# Altium PCB Boost&Buck.PcbDoc
Units mil, origin at the board's own origin, x right, y up, seen from the top; angles counter-clockwise.
Board outline 2340 x 2735 mil, 2 copper layers (Top Layer, Bottom Layer); 31 components, 15 nets, 88 pads, 0 vias.
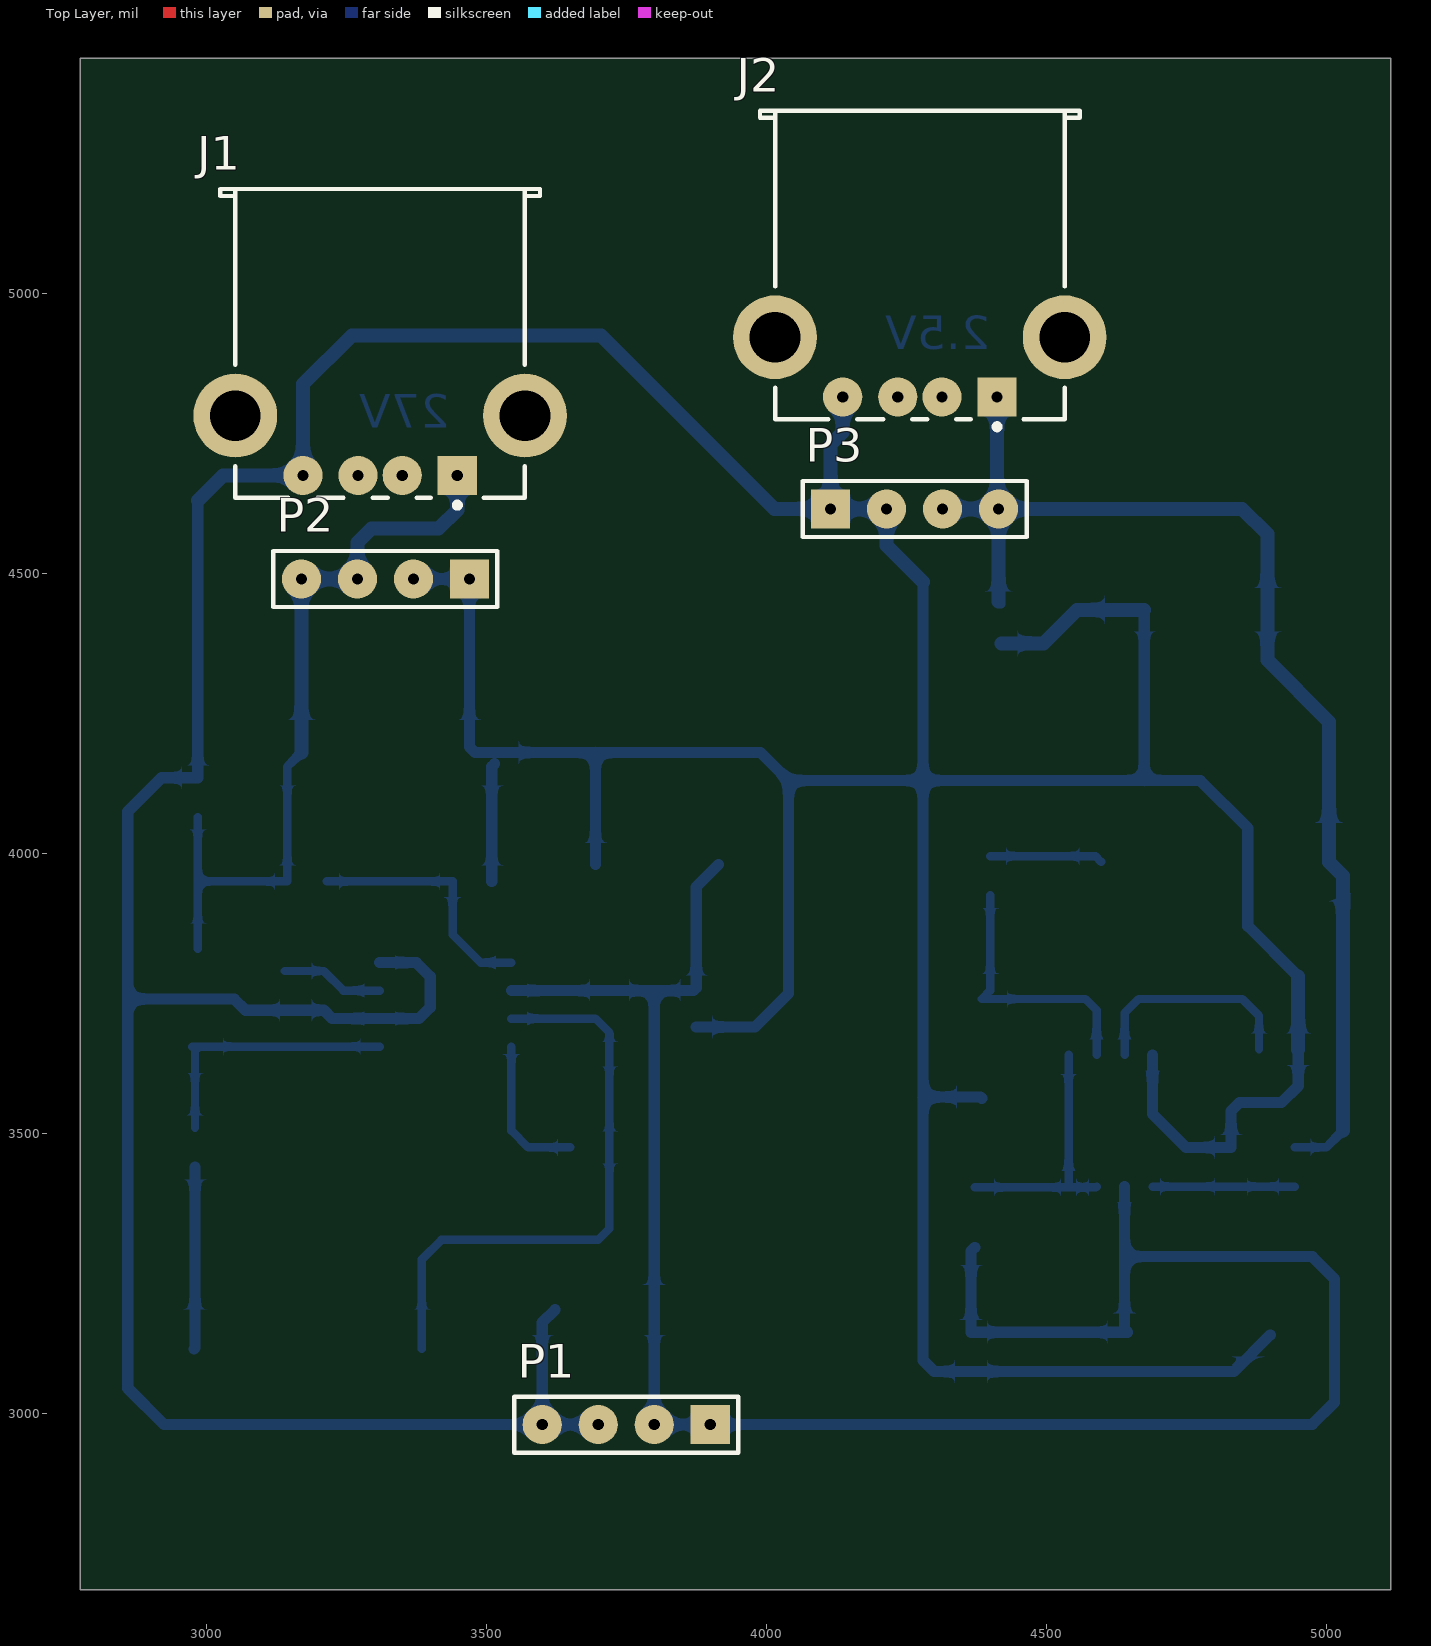
[diagram p0: Top Layer view]
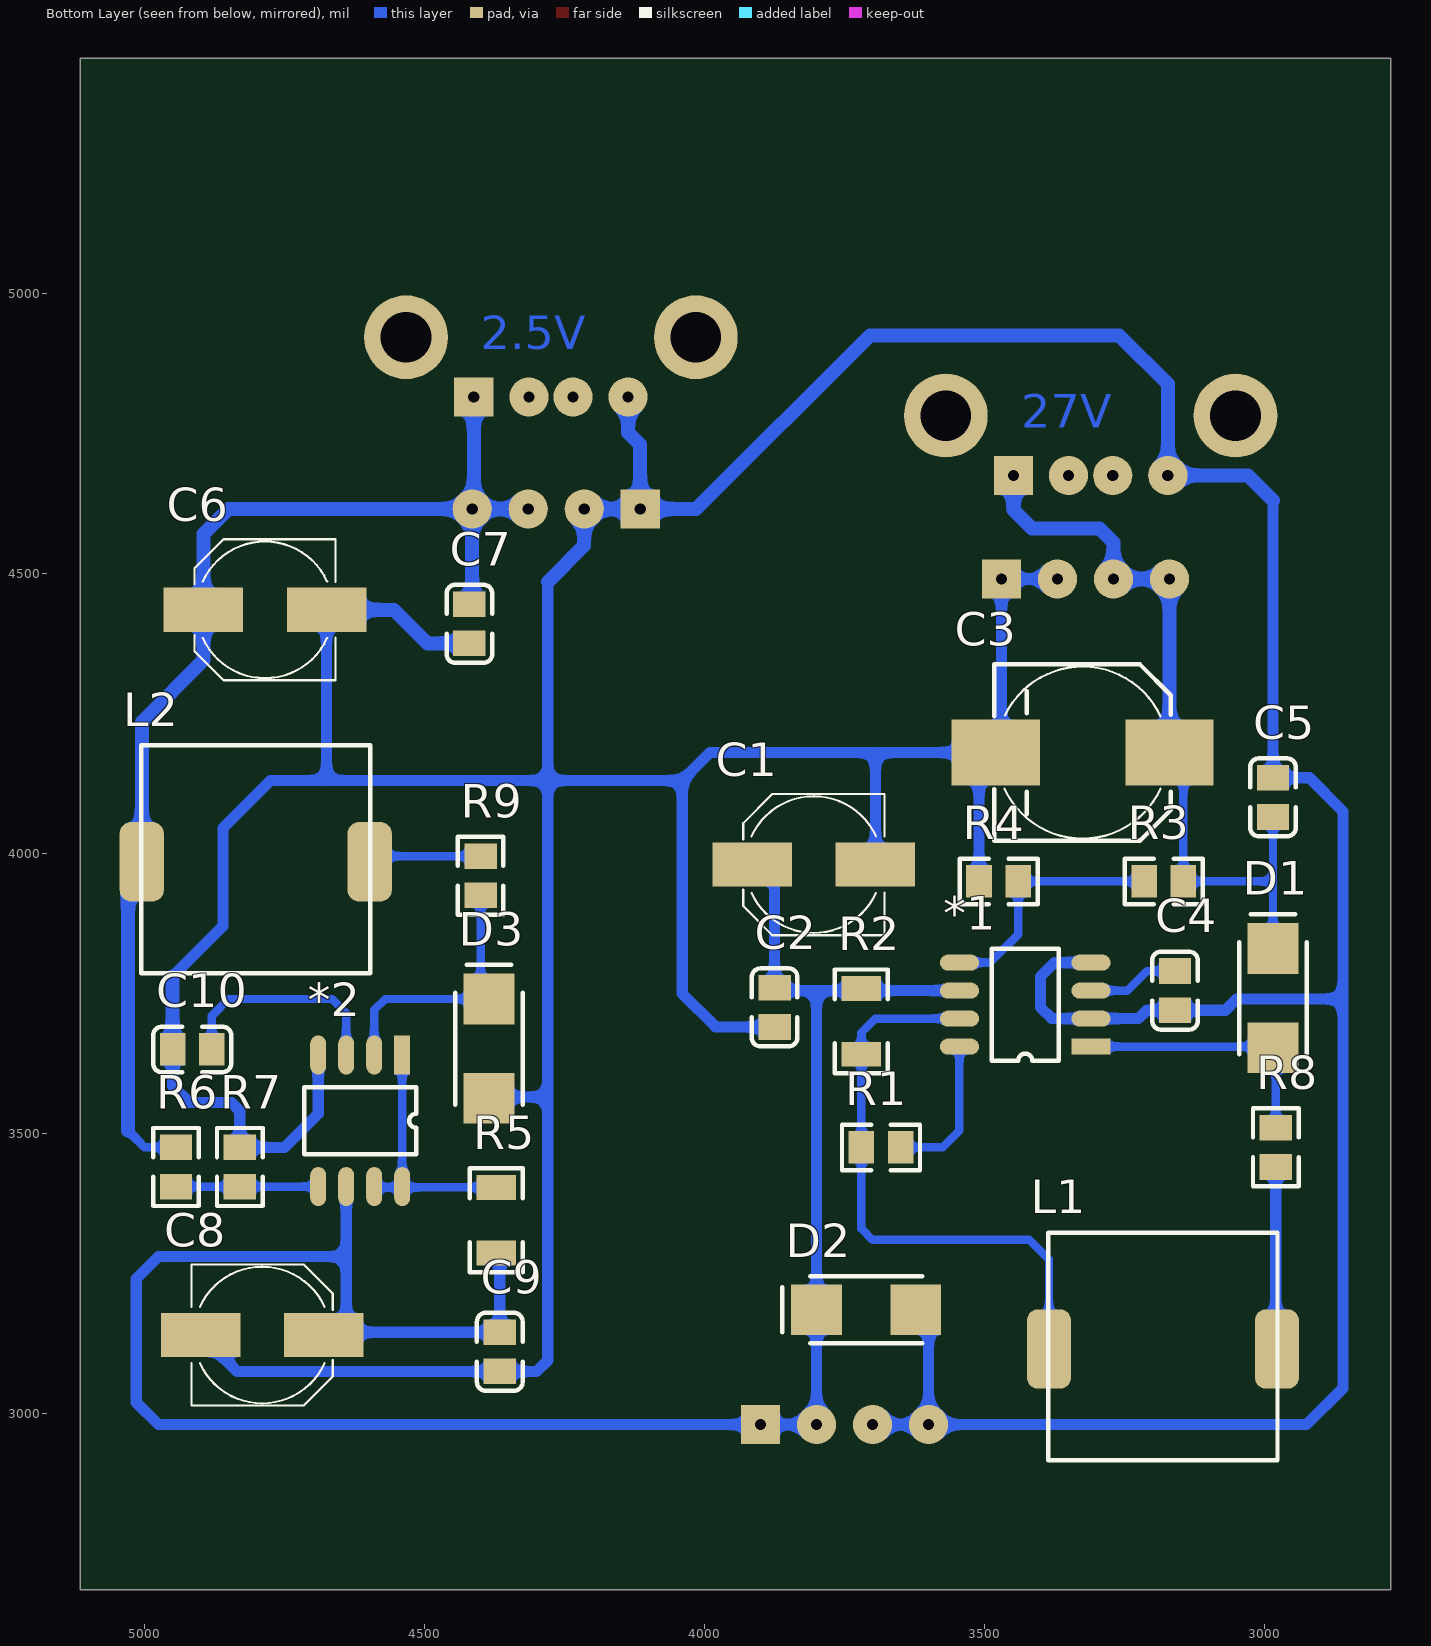
[diagram p1: Bottom Layer view, seen from below]
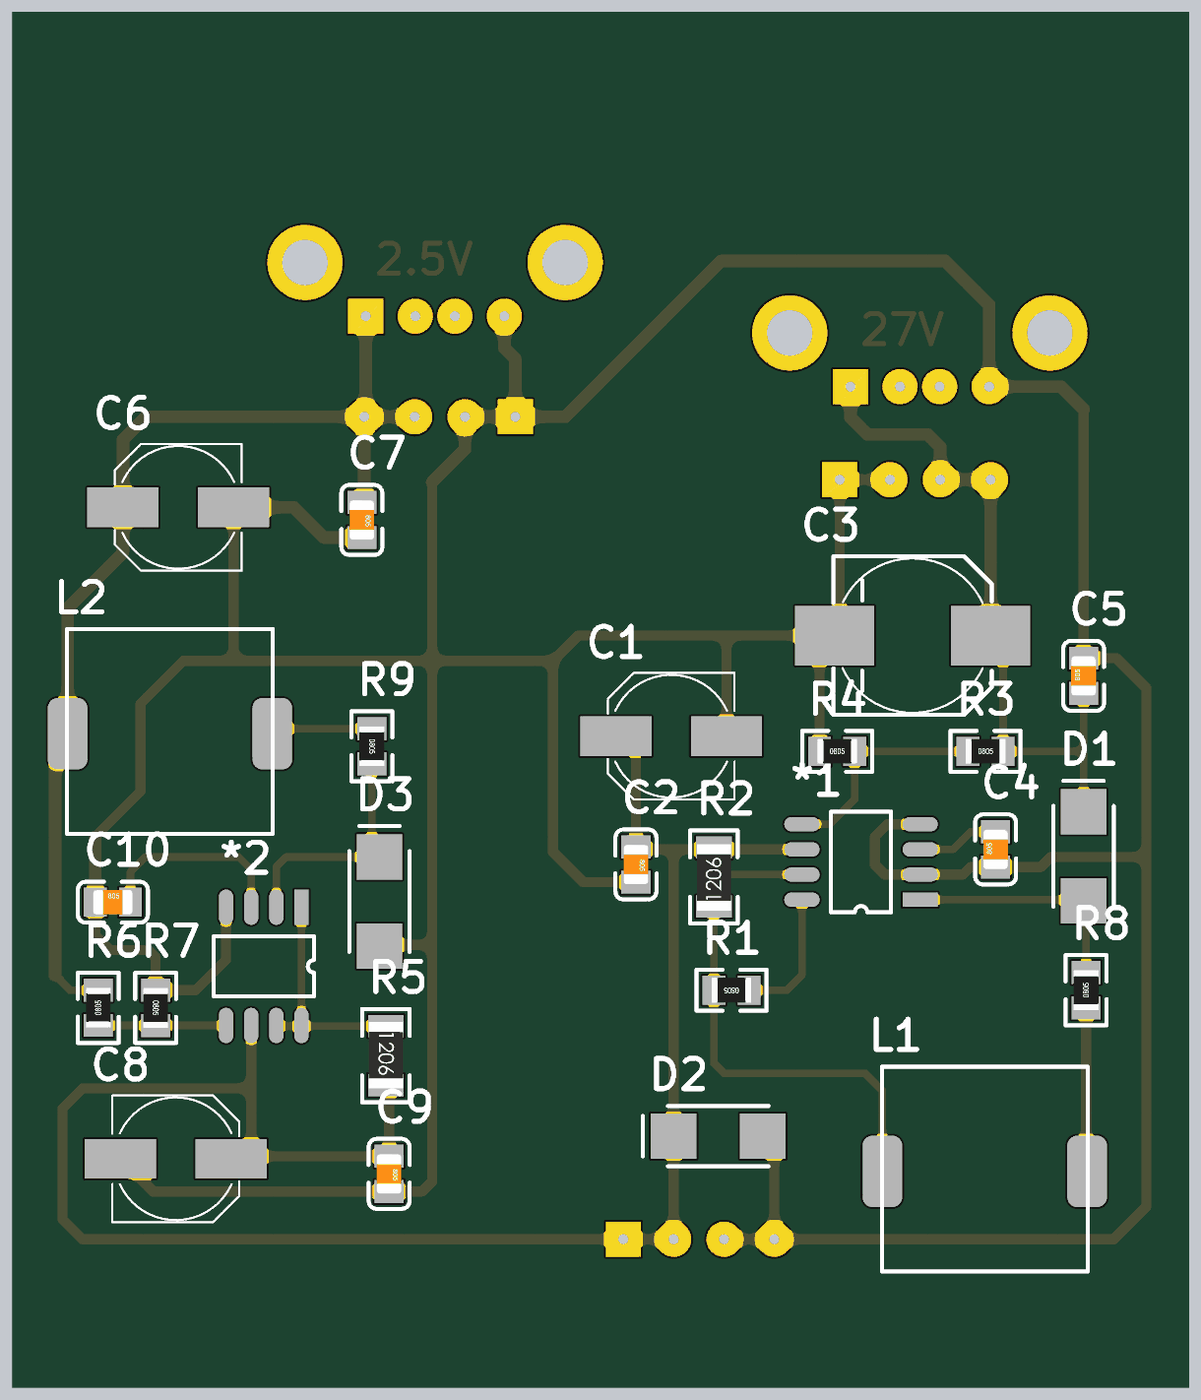
[diagram p2: 3D render of the assembled board from below, using the file's embedded part models]

## Layer stack, top to bottom
Top Solder: solder mask 0.4, Solder Resist, Dk 3.5
Top Layer: signal copper 1.4
Dielectric 1: dielectric 12.6, FR-4, Dk 4.8
Bottom Layer: signal copper 1.4
Bottom Solder: solder mask 0.4, Solder Resist, Dk 3.5

## Board outline
2775,2685 2775,5420 5115,5420 5115,2685

## Design rules (kind name [scope] priority, off if disabled: settings)
Clearance [All] p1: gap=10 ignorepadtopadclearanceinfootprint=FALSE except(0: Arc-Hole Track-Hole SMDPad-Hole THPad-Hole Via-Hole Fill-Hole Poly-Hole Region-Hole Text-Hole)
PolygonConnect [All] p1: connectstyle=Relief reliefconductorwidth=10 reliefentries=4 polygonreliefangle="90 Angle" airgapwidth=10
RoutingVias [All] p1: holewidth=28 width=50 viastyle="Through Hole" minholewidth=28 minwidth=50 maxholewidth=28 maxwidth=50
SolderMaskExpansion [All] p1: expansion=4
Width [All] p1: maxlimit=30 minlimit=7 preferedwidth=10
30 further rules are at their usual default settings.

## Components (designator, comment, footprint, x,y, rotation, side; value= is the part's Value field where it differs from the comment)
*1 "MC34063A" SOP-8 3309.88,3655 r0 bottom
*2 "MC34063A" SOP-8 4540,3640.12 r270 bottom
C1 "220uF/16V" C-RB-S6 3805,3980 r180 bottom
C2 "100nF" 0805_C 3875,3725 r270 bottom
C3 "100uF/50V" C-RB-S8 3325,4180 r0 bottom
C4 "510pF" 0805_C 3160,3755 r90 bottom
C5 "100nF" 0805_C 2985,4100 r90 bottom
C6 "220uF/16V" C-RB-S6 4785,4435 r180 bottom
C7 "100nF" 0805_C 4420,4410 r270 bottom
C8 "220uF/16V" C-RB-S6 4790,3140 r0 bottom
C9 "100nF" 0805_C 4365.75,3110 r270 bottom
C10 "510pF" 0805_C 4915,3650 r180 bottom
D1 "FR107" DIODE-SMA 2985,3652.84 r90 bottom
D2 "FR107" DIODE-SMA 3622.84,3185 r0 bottom
D3 "FR107" DIODE-SMA 4385,3562.84 r90 bottom
J1 "USB" USB_A1 3310.63,5186.42 r90 top
J2 "USB" USB_A1 4274.37,5326.42 r90 top
L1 "10uH" CDRH104R 3386,2916 r90 bottom
L2 "10uH" CDRH104R 5006,3786 r90 bottom
P1 "Header 4" HDR1X4 3900,2980 r180 top
P2 "Header 4" HDR1X4 3470,4490 r180 top
P3 "Header 4" HDR1X4 4115,4615 r0 top
R1 "100Ω" 0805_R 3685,3475 r0 bottom
R2 "330mR" 1206_R 3720,3700 r90 bottom
R3 "47kΩ" 0805_R 3180,3950 r180 bottom
R4 "2K2" 0805_R 3475,3950 r180 bottom
R5 "330mR" 1206_R 4372.24,3345 r270 bottom
R6 "3.3KΩ" 0805_R 4943.94,3440.04 r90 bottom
R7 "3.3KΩ" 0805_R 4830,3440 r270 bottom
R8 "0Ω" 0805_R 2980,3475 r90 bottom
R9 "0Ω" 0805_R 4400,3960 r270 bottom

## Footprints (in the part's own frame and the unit in brackets; to place one, negate y for a bottom-side part, rotate by r counter-clockwise, add the part's x,y. Pads: shape width x height; smd on the part's side, far side on the other; paste and mask are expansions set on the pad)
0805_C [mm]
  rect 1.16x1.47 smd: 1(-0.89,0) 2(0.89,0)
  silkscreen extent -1.77,-1.04 1.77,1.04, body extent -1,-0.63 1,0.63, height 0.77
0805_R [mm]
  rect 1.16x1.47 smd: 1(-0.89,0) 2(0.89,0)
  silkscreen extent -1.77,-1.04 1.77,1.03, body extent -1,-0.63 1,0.63, height 0.49
1206_R [mm]
  rect 1.13x1.8 smd: 1(-1.49,0) 2(1.49,0)
  silkscreen extent -2.36,-1.2 2.35,1.2, body extent -1.7,-0.86 1.65,0.87, height 0.85
C-RB-S6 [mm] "贴片电解"
  rect 3.6x2 smd: 1(-2.794,0) 2(2.794,0)
  silkscreen extent -3.2,-3.2 3.2,3.2, body extent -3.15,-3.12 3.15,3.17, height 7.7
C-RB-S8 [mm] "贴片电解"
  rect 4x3 smd: 1(-3.937,0) 2(3.937,0)
  silkscreen extent -4,-4 4,4, body extent -3.94,-3.94 3.94,3.94, height 10.9
CDRH104R [mil] "10*10*4 贴片功率电感"
  rrect50% 141.73x78.74 smd: 1(199,-1) 2(199,-408)
  silkscreen extent 0,-409 407,0
DIODE-SMA [mm] "贴片二极管"
  rect 2.3x2.3 smd: 1(0,0) 2(4.5,0)
  silkscreen extent -0.29,-1.52 6.06,1.52, body extent -0.67,-1.4 5.17,1.4, height 3
HDR1X4 [mil] "Connector; Header; 4 Position"
  rect 70x70 hole 20: 1(0,0)
  round 70 hole 20: 2(100,0) 3(200,0) 4(300,0)
  silkscreen extent -50,-50 350,50
SOP-8 [mm]
  rect 1.78x0.72 smd: 1(0,0)
  oval 1.78x0.72 smd: 2(0,-1.27) 3(0,-2.54) 4(0,-3.81) 5(5.972,-3.81) 6(5.972,-2.54) 7(5.972,-1.27) 8(5.972,0)
  silkscreen extent 1.47,-4.44 4.5,0.64, body extent 0.38,-4.44 5.46,0.64, height 1.28
USB_A1 [mm]
  rect 1.778x1.778 hole 0.508: 1(-12.99,-3.5)
  round 1.778 hole 0.508: 2(-12.99,-1) 3(-12.99,1) 4(-12.99,3.5)
  round 3.8 hole 2.3: 5(-10.28,6.57) 6(-10.28,-6.57)
  silkscreen extent -14.46,-7.25 0,7.25, body extent -14.05,-6.63 0.08,6.63, height 7.2

## Part data
C1 C3 C6 C8: library part "Cap Pol", "极性电解电容", LatestRevisionDate=17-Jul-2002, LatestRevisionNote="Re-released for DXP Platform.", PackageReference=RB7.6-15, Published=8-Jun-2000, Publisher="Altium Limited"
C2 C5 C7 C9: library part "0805 100nF(104) 10% 50V", "贴片电容", Package=0805, SuppliersPartNumber=C49678, ComponentLink1Description=供应商, ComponentLink1URL=http://www.szlcsc.com/product/details_50686.html, Supplier=LC
C4 C10: library part "0805 470pF (471) 10% 50V", "贴片电容", Package=0805, SuppliersPartNumber=C1743, ComponentLink1Description=供应商, ComponentLink1URL=http://www.szlcsc.com/product/details_2095.html, Supplier=LC
D1 D2 D3: library part Diode, "二极管", PackageDocument=Sep-1996, Code_JEDEC=DO-214-AB, LatestRevisionDate=17-Jul-2002, LatestRevisionNote="Re-released for DXP Platform.", PackageReference=SMC, Published=8-Jun-2000, Publisher="Altium Limited"
J1 J2: "USB接口"
L1 L2: library part Inductor, "电感", Code_IEC=1005, Code_JEITA=0402, LatestRevisionDate=17-Jul-2002, LatestRevisionNote="Re-released for DXP Platform.", PackageReference=0402-A, Published=8-Jun-2000, Publisher="Altium Limited"
P1 P2 P3: "Header, 4-Pin", LatestRevisionDate=17-Jul-2002, LatestRevisionNote="Re-released for DXP Platform.", Publisher="Altium Limited"
R1 R3 R4: library part "0805 100Ω (1000) 1%", "贴片电阻", Package=0805, SuppliersPartNumber=C17408, ComponentLink1Description=供应商, ComponentLink1URL=http://www.szlcsc.com/product/details_18096.html, Supplier=LC
R2 R5: library part "1206 0.1Ω (R100) 1%", "贴片电阻", Package=1206, SuppliersPartNumber=C25334, ComponentLink1Description=供应商, ComponentLink1URL=http://www.szlcsc.com/product/details_26077.html, Supplier=LC
R6 R7: library part "0805 3.3KΩ (3301) 1%", "贴片电阻", Package=0805, SuppliersPartNumber=C26010, ComponentLink1Description=供应商, ComponentLink1URL=http://www.szlcsc.com/product/details_26753.html, Supplier=LC
R8 R9: library part "0805 0Ω (0R0) 1%", "贴片电阻", Package=0805, SuppliersPartNumber=C17477, ComponentLink1Description=供应商链接, ComponentLink1URL=http://www.szlcsc.com/product/details_18165.html, Supplier=LC

## Nets (pads, with @x,y where several pads share a name; then routed paths per layer and width w, separated by ;. In a path a pad name is that pad's centre, name@x,y a point inside that pad or via, vN(x,y) a via of type N, cw(c..) or ccw(c..) an arc to the next point about the centre after c; other vN are vias at no path point)
+2.5: C6.1 C7.1 J2.1 L2.1 P3.3 P3.4 R6.2 | length 2191.2
  Bottom Layer w15: P3.4@4412.17,4617.83 P3.4 ; C7.1@4415,4450.04 C7.1 ; R6.2 5000.08,3475.08 5030,3505
  Bottom Layer w25: P3.3 P3.4 ; P3.4@4412.17,4617.83 J2.1 ; C7.1@4415,4450.04 P3.4 ; 5030,3505 5030,3960 L2.1 5005,4235 4895,4345 C6.1 4895,4570 4850,4615 P3.4
+5: *1.6 *2.6 C1.1 C2.1 C8.1 C9.1 D2.2 P1.1 P1.2 R2.2 R5.2 | length 3882.1
  Bottom Layer w20: *1.6 3800,3755 ; C1.1 3875,3940 C2.1 3869.96,3755 3800,3755 ; R5.2@4372.24,3296.34 4365.75,3289.84 C9.1 4645.04,3145.04 4640,3150.08 4640,3280 ; *2.6 4640,3280 ; 3800,3755 P1.2 P1.1 4975,2980 5015,3020 5015,3240 4975,3280 4640,3280
+27: C3.1 C5.1 D1.2 J1.1 P2.3 P2.4 R3.2 | length 1374.5
  Bottom Layer w15: D1.2 2985,3950 ; C5.1 2985,3950 ; C3.1 3144.96,4154.96 R3.2 2985,3950
  Bottom Layer w25: C3.1 P2.4 P2.3 3270,4555 3295,4580 3415,4580 3448.43,4613.43 J1.1
GND: *1.2 *1.4 *2.4 C1.2 C2.2 C3.2 C4.1 C5.2 C6.2 C7.2 C8.2 C9.2 C10.1 D2.1 D3.1 J1.4 J2.4 P1.3 P1.4 P2.1 P2.2 P3.1 P3.2 R4.1 R7.1 | length 11955.2
  Bottom Layer w20: 2985,4630 C5.2 2920.04,4135.04 2860,4075 2860,3740 ; *1.4 3375,3805 3400,3780 3400,3725 3380,3705 *1.2 3225,3705 3210.04,3719.96 C4.1 3070.04,3719.96 3050,3740 2860,3740 ; P2.2 P2.1 3470,4190 C3.2 3695,4180 ; R4.1 3510.04,4155.04 C3.2@3515,4160 ; D2.1 3600,3162.16 P1.4 ; C1.2 3695,4180 ; P1.3 P1.4 ; C2.2 3979.96,3689.96 4040,3750 4040,4130 ; 4280,4485 4280,4130 ; D3.1 4382.84,3565 4280,3565 ; C6.2 4675,4130 ; *2.4 4690,3535 4749.96,3475.04 R7.1 4830,3540 4845,3555 4920,3555 4950.04,3585.04 C10.1 ; C8.2 4834.96,3074.96 C9.2 4300.04,3074.96 4280,3095 4280,3565 ; 4950.04,3780 4860,3870.04 4860,4045 4775,4130 4675,4130 ; 2860,3740 2860,3045 2925,2980 P1.4 ; 3695,4180 3990,4180 4040,4130 ; 4040,4130 4280,4130 ; 4280,3565 4280,4130 ; 4280,4130 4675,4130
  Bottom Layer w25: 2985,4630 3030,4675 J1.4 3172.83,4837.83 3260,4925 3705,4925 4015,4615 P3.1 ; J2.4 4136.57,4751.57 4115,4730 P3.1 ; 4280,4485 4215,4550 P3.2 P3.1 ; C7.2 4494.96,4374.96 4555,4435 C6.2 ; C10.1 4950.04,3780
Net*1_1: *1.1 D1.1 R8.2 | length 479.7
  Bottom Layer w15: D1.1@2975,3655 *1.1 ; R8.2 2980,3647.84 D1.1
Net*1_3: *1.3 C4.2 | length 184.4
  Bottom Layer w15: C4.2@3140,3790.04 3209.96,3790.04 3245,3755 *1.3
Net*1_5: *1.5 R3.1 R4.2 | length 445.6
  Bottom Layer w15: R3.1 R4.2 3439.96,3855.04 3490,3805 *1.5
Net*1_7: *1.7 L1.1 R1.2 R2.1 | length 1053.2
  Bottom Layer w15: L1.1 3385,3275 3420,3310 3700,3310 3720.04,3330.04 R1.2 R2.1 R2.1 3720,3680 3695,3705 *1.7
Net*1_8: *1.8 R1.1 | length 267.4
  Bottom Layer w15: *1.8 3545,3505 3575,3475 R1.1
Net*2_1: *2.1 *2.7 *2.8 R5.1 | length 454.8
  Bottom Layer w15: R5.1 *2.8@4540,3403.66 ; *2.1 *2.8 *2.8@4540,3403.66 ; *2.7 4588.66,3403.66 *2.8@4540,3403.66
Net*2_2: *2.2 D3.2 R9.2 | length 484.3
  Bottom Layer w15: R9.2 4400,3755 D3.2 4570,3740 4590,3720 *2.2
Net*2_3: *2.3 C10.2 | length 397.6
  Bottom Layer w15: *2.3 4640,3715 4665,3740 4850,3740 4879.96,3710.04 C10.2
Net*2_5: *2.5 R6.1 R7.2 | length 253.9
  Bottom Layer w15: *2.5 R6.1
NetL1_2: L1.2 R8.1 | length 325.8
  Bottom Layer w20: L1.2 2980,3117 R8.1
NetL2_2: L2.2 R9.1 | length 202.2
  Bottom Layer w15: R9.1 4587.96,3995.04 L2.2
pads on no net: J1.2 J1.3 J1.5 J1.6 J2.2 J2.3 J2.5 J2.6

## Other copper
Bottom Layer:
  text "2.5V" at 4400,4900 h60
  text "27V" at 3435,4760 h60

## Silkscreen, mask and mechanical layers (free items; w line width, h text height)
Mechanical 1:
  rectangle: 2775,2685 5115,5420
  lines w8: 2775,2685 2775,5420 5115,5420 5115,2685 2775,2685